# Altium PCB PCB1.PcbDoc
Units mm, origin at the board's own origin, x right, y up, seen from the top; angles counter-clockwise.
Board outline 147.6 x 31 mm, 2 copper layers (Top Layer, Bottom Layer); 2 components, 5 nets, 40 pads, 0 vias.
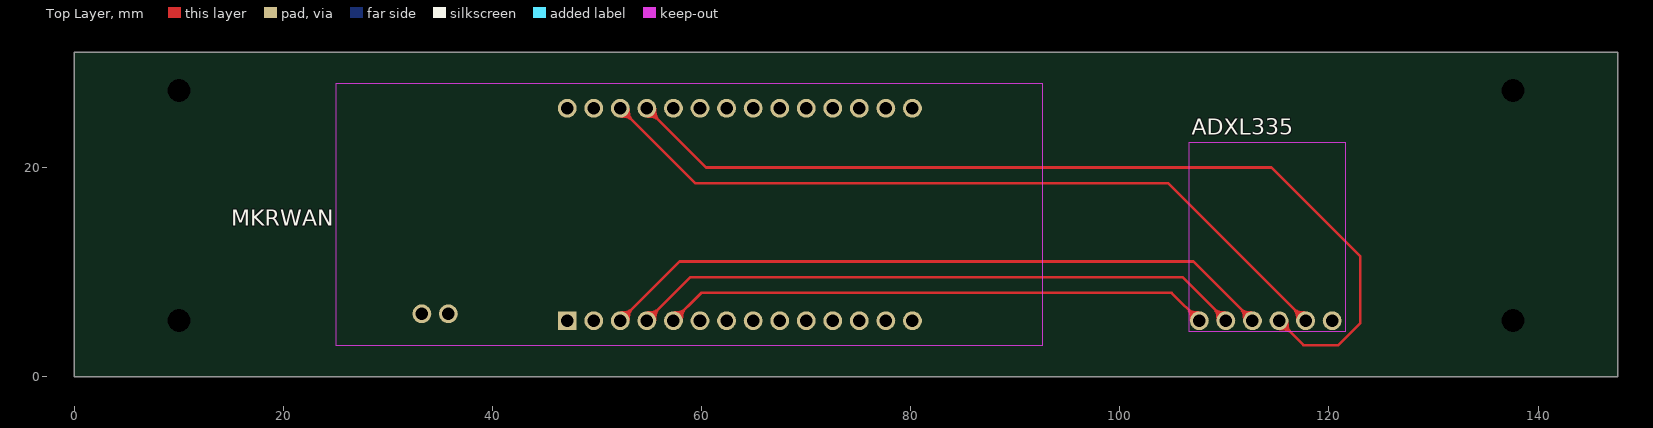
[diagram p0: Top Layer view]
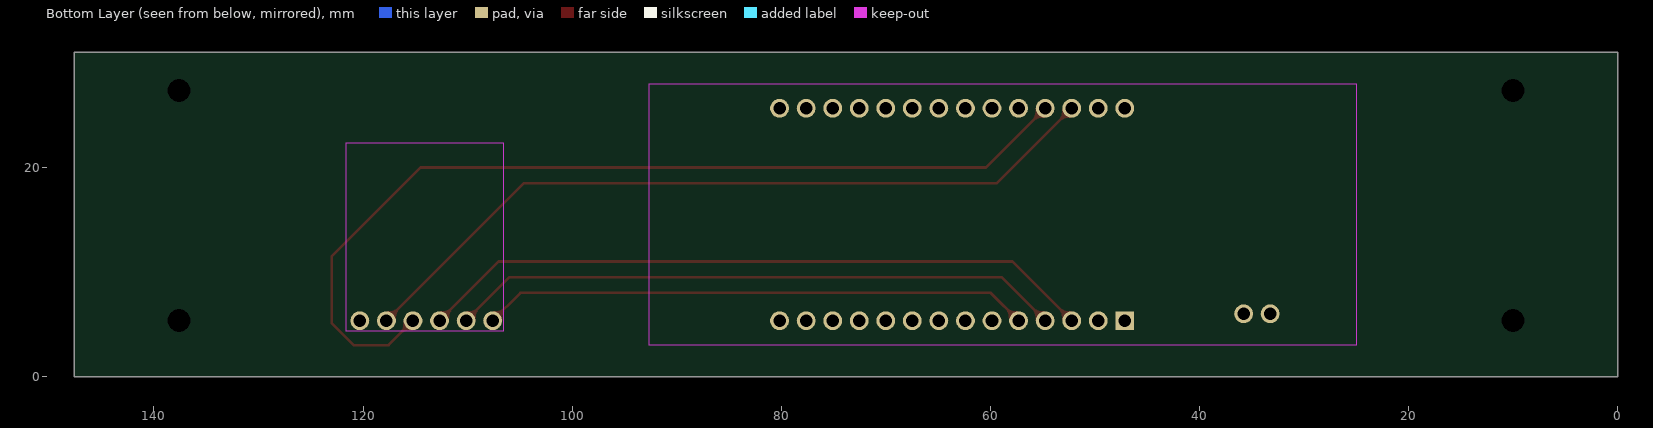
[diagram p1: Bottom Layer view, seen from below]

## Layer stack, top to bottom
Top Solder: solder mask 0.0102, Solder Resist, Dk 3.5
Top Layer: signal copper 0.0356
Dielectric 1: dielectric 0.32, FR-4, Dk 4.8
Bottom Layer: signal copper 0.0356
Bottom Solder: solder mask 0.0102, Solder Resist, Dk 3.5

## Board outline
0,0 147.6,0 147.6,31 0,31

## Design rules (kind name [scope] priority, off if disabled: settings)
Clearance [All] p1: gap=0.254 ignorepadtopadclearanceinfootprint=FALSE except(0: Arc-Hole Track-Hole SMDPad-Hole THPad-Hole Via-Hole Fill-Hole Poly-Hole Region-Hole Text-Hole)
PolygonConnect [All] p1: connectstyle=Relief reliefconductorwidth=0.254 reliefentries=4 polygonreliefangle="90 Angle" airgapwidth=0.254
RoutingVias [All] p1: holewidth=0.711 width=1.27 viastyle="Through Hole" minholewidth=0.711 minwidth=1.27 maxholewidth=0.711 maxwidth=1.27
SolderMaskExpansion [All] p1: expansion=0.102 istentingtop=FALSE
Width [All] p1: maxlimit=0.254 minlimit=0.254 preferedwidth=0.254
30 further rules are at their usual default settings.

## Components (designator, comment, footprint, x,y, rotation, side; value= is the part's Value field where it differs from the comment)
ADXL335 "ADXL335_Symbol" ADXL335_HEADERS 107.6,5.34 r0 top
MKRWAN "MKR_WAN_1300_Symbol" MKR_WAN_1300_Headers 47.135,5.34 r90 top

## Footprints (in the part's own frame and the unit in brackets; to place one, negate y for a bottom-side part, rotate by r counter-clockwise, add the part's x,y. Pads: shape width x height; smd on the part's side, far side on the other; paste and mask are expansions set on the pad)
ADXL335_HEADERS [mm]
  round 1.8 hole 1.2: 1(0,0) 2(2.54,0) 3(5.08,0) 4(7.62,0) 5(10.16,0) 6(12.7,0)
  Keep-Out Layer region: -1,-1 14,-1 14,17 -1,17
MKR_WAN_1300_Headers [mm]
  rect 1.8x1.8 hole 1.2: 1(0,0)
  round 1.8 hole 1.2: 2(0,-2.54) 3(0,-5.08) 4(0,-7.62) 5(0,-10.16) 6(0,-12.7) 7(0,-15.24) 8(0,-17.78) 9(0,-20.32) 10(0,-22.86) 11(0,-25.4) 12(0,-27.94) 13(0,-30.48) 14(0,-33.02) 15(20.32,-33.02) 16(20.32,-30.48) 17(20.32,-27.94) 18(20.32,-25.4) 19(20.32,-22.86) 20(20.32,-20.32) 21(20.32,-17.78) 22(20.32,-15.24) 23(20.32,-12.7) 24(20.32,-10.16) 25(20.32,-7.62) 26(20.32,-5.08) 27(20.32,-2.54) 28(20.32,0) 29(0.66,11.365) 30(0.66,13.905)
  Keep-Out Layer region: -2.34,22.135 -2.34,-45.465 22.66,-45.465 22.66,22.135

## Free pads (board coordinates)
  round 1.524 hole 2.2 unplated: M2(10,5.34) M2(10,27.34) M2(137.6,5.34) M2(137.6,27.34)

## Nets (pads, with @x,y where several pads share a name; then routed paths per layer and width w, separated by ;. In a path a pad name is that pad's centre, name@x,y a point inside that pad or via, vN(x,y) a via of type N, cw(c..) or ccw(c..) an arc to the next point about the centre after c; other vN are vias at no path point)
3v3: ADXL335.5 MKRWAN.26 | length 74
  Top Layer w0.254: MKRWAN.26 59.375,18.5 104.6,18.5 ADXL335.5
GND: ADXL335.4 MKRWAN.25 | length 90.1
  Top Layer w0.254: MKRWAN.25 60.415,20 114.5,20 123,11.5 123,5.1 120.9,3 117.56,3 ADXL335.4
x_axis: ADXL335.3 MKRWAN.3 | length 65.2
  Top Layer w0.254: MKRWAN.3 57.875,11 107.02,11 ADXL335.3
y_axis: ADXL335.2 MKRWAN.4 | length 58.8
  Top Layer w0.254: MKRWAN.4 58.915,9.5 105.98,9.5 ADXL335.2
z_axis: ADXL335.1 MKRWAN.5 | length 52.5
  Top Layer w0.254: MKRWAN.5 59.955,8 104.94,8 ADXL335.1
pads on no net: ADXL335.6 MKRWAN.1 MKRWAN.2 MKRWAN.6 MKRWAN.7 MKRWAN.8 MKRWAN.9 MKRWAN.10 MKRWAN.11 MKRWAN.12 MKRWAN.13 MKRWAN.14 MKRWAN.15 MKRWAN.16 MKRWAN.17 MKRWAN.18 MKRWAN.19 MKRWAN.20 MKRWAN.21 MKRWAN.22 MKRWAN.23 MKRWAN.24 MKRWAN.27 MKRWAN.28 MKRWAN.29 MKRWAN.30